# EAGLE board ADS1293testcircuit (EAGLE 8.6.0)
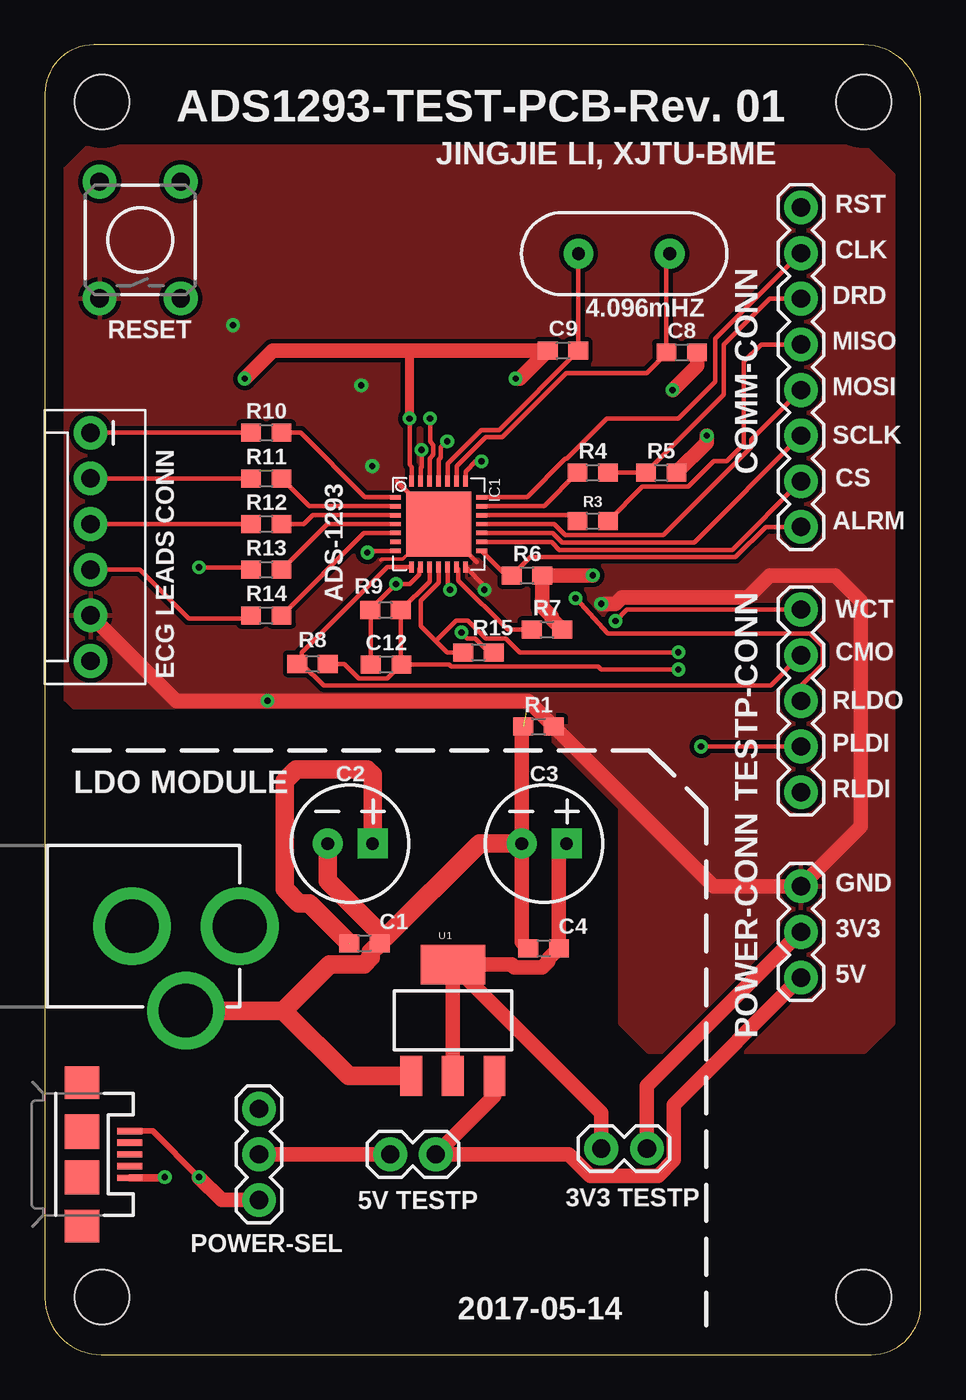
[diagram p0: board, top side]
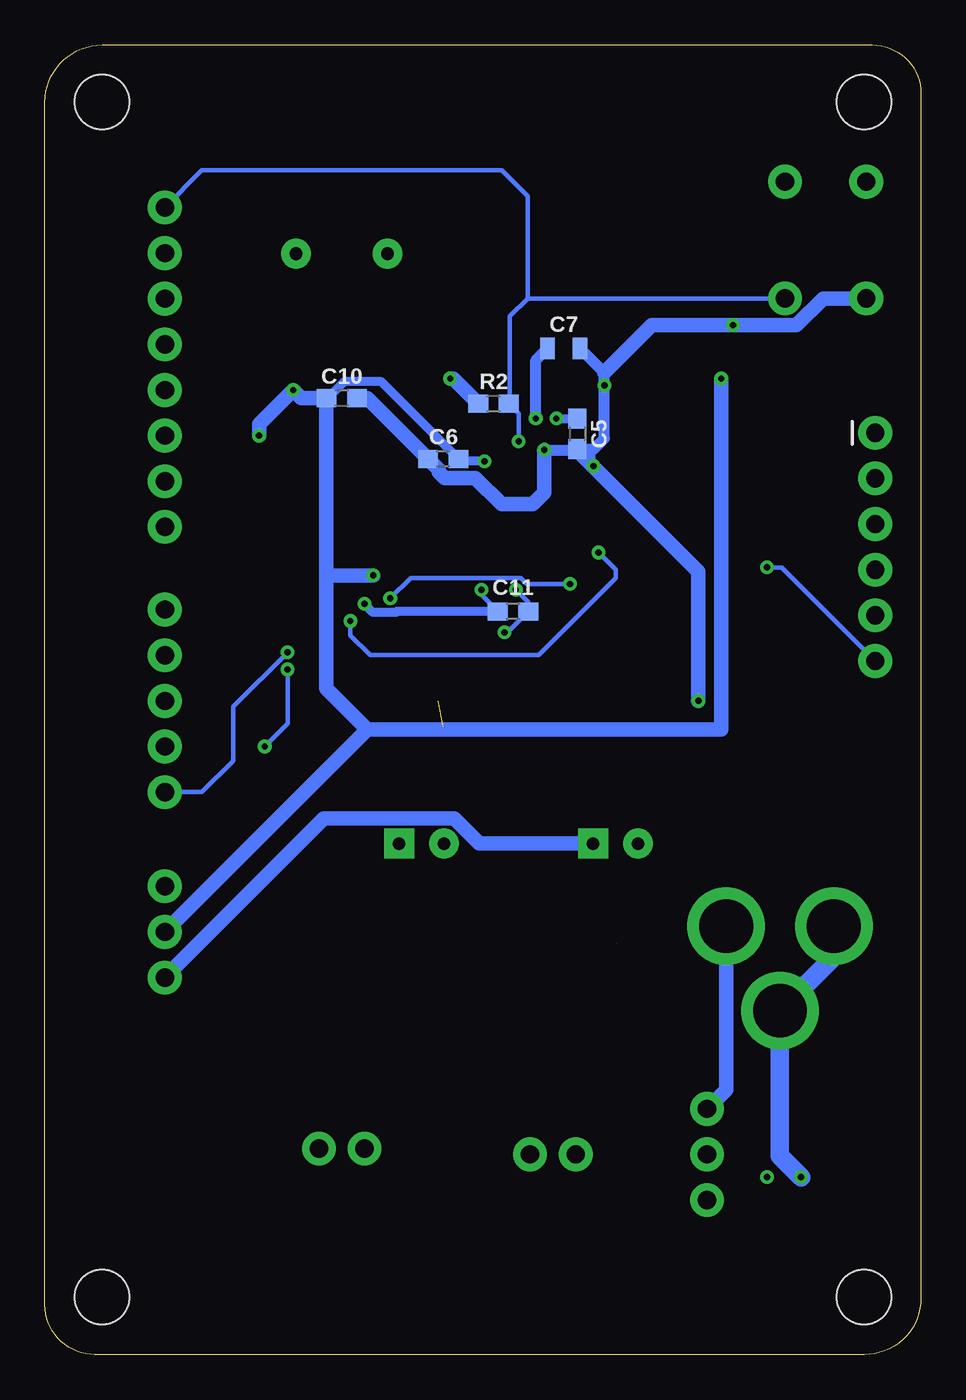
[diagram p1: board, bottom side, seen from below]

Size 48.74 x 72.9 mm. Coordinates in mm from the lower left corner, seen from the top.
Outline: 3.14,0 45.97,0 arc90 48.74,2.77 48.74,69.71 arc90 45.55,72.9 2.71,72.9 arc90 0,70.19 0,3.15 arc90 3.14,0
Copper layers (1*16): Top 0.035mm / dielectric 1.5mm / Bottom 0.035mm
Design rules "default": minimum track width 6mil, minimum drill 0.35mm, track to track 6mil, track to pad 6mil, pad to pad 6mil, via to via 6mil, smd to smd 6mil, copper to edge 40mil, drill to drill 6mil, minimum pad ring 10mil, minimum via ring 8mil, stop-mask expansion 4mil, vias tented up to drill 0mil, thermal gap 10mil

## Footprints (pad centres in the part's own frame; a part is rotated, then mirrored left to right if it is on the bottom)
1X02 = drill 1.016 pad 1.88: 1 0,0; 2 2.54,0
0603 = smd 1.1 x 1: 1 -0.85,0; 2 0.85,0
CPOL-RADIAL-2.5MM-6.5MM = drill 0.7 pad 1.651 square: 1 1.25,0 | drill 0.7 pad 1.651: 2 -1.25,0
0805 = smd 0.8 x 1.2: 1 -0.9,0; 2 0.9,0
1X08 = drill 1.016 pad 1.88: 1 0,0; 2 2.54,0; 3 5.08,0; 4 7.62,0; 5 10.16,0; 6 12.7,0; 7 15.24,0; 8 17.78,0
QFN28-5X5 = smd 0.25 x 0.6: 1 -1.5,-2.4; 2 -1,-2.4; 3 -0.5,-2.4; 4 0,-2.4; 5 0.5,-2.4; 6 1,-2.4; 7 1.5,-2.4; 15 1.5,2.4; 16 1,2.4; 17 0.5,2.4; 18 0,2.4; 19 -0.5,2.4; 20 -1,2.4; 21 -1.5,2.4 | smd 0.6 x 0.25: 8 2.4,-1.5; 9 2.4,-1; 10 2.4,-0.5; 11 2.4,0; 12 2.4,0.5; 13 2.4,1; 14 2.4,1.5; 22 -2.4,1.5; 23 -2.4,1; 24 -2.4,0.5; 25 -2.4,0; 26 -2.4,-0.5; 27 -2.4,-1; 28 -2.4,-1.5 | smd 3.6 x 3.6: GND 0,0
POWER_JACK_PTH = drill 2.997 pad 4.318: GND 0,7.7; GNDBREAK 4.7,10.7; PWR 0,13.7
USB-MICROB = smd 1.4 x 0.35: D+ -2.65,0; D- -2.65,-0.65; GND -2.65,1.3; ID -2.65,0.65; VBUS -2.65,-1.3 | smd 1.9 x 1.8: MT1 0,-4; MT2 0,4 | smd 1.9 x 1.9: P$1 0,-1.27; P$2 0,1.27
1X03 = drill 1.016 pad 1.88: 1 0,0; 2 2.54,0; 3 5.08,0
TACTILE_SWITCH_PTH_6.0MM = drill 1.016 pad 1.88: 1 -3.251,2.261; 2 3.251,2.261; 3 -3.251,-2.261; 4 3.251,-2.261
MOLEX-1X6 = drill 1.016 pad 1.88: 1 0,0; 2 2.54,0; 3 5.08,0; 4 7.62,0; 5 10.16,0; 6 12.7,0
1X05 = drill 1.016 pad 1.88: 1 0,0; 2 2.54,0; 3 5.08,0; 4 7.62,0; 5 10.16,0
SOT223 = smd 1.219 x 2.235: 1 -2.311,-3.099; 2 0,-3.099; 3 2.311,-3.099 | smd 3.6 x 2.2: 4 0,3.099
STAND-OFF-TIGHT = hole 3.048: 0,0
HC49US = drill 0.7 pad 1.651: 1 -2.54,0; 2 2.54,0

## Placement (x,y rotation side)
3V3-POWER-TESTPOINT  [1X02]  33.5,11.46 180 top
5V-POWER-TESTPOINT  [1X02]  21.75,11.14 180 top
C1  0.1uF  [0603]  17.78,22.89 0 top
C2  100uF  [CPOL-RADIAL-2.5MM-6.5MM]  16.99,28.45 0 top
C3  100uF  [CPOL-RADIAL-2.5MM-6.5MM]  27.78,28.45 0 top
C4  0.1uF  [0603]  27.75,22.61 180 top
C5  0.1uF  [0603]  19.11,51.24 270 bottom
C6  0.1uF  [0603]  26.57,49.85 180 bottom
C7  1.0uF  [0805]  19.88,56.01 0 bottom
C8  22pF  [0603]  35.43,55.78 0 top
C9  22pF  [0603]  28.83,55.88 180 top
C10  0.1uF  [0603]  32.23,53.24 0 bottom
C11  0.1uF  [0603]  22.7,41.37 180 bottom
C12  1nF  [0603]  18.99,38.42 0 top
COMM-CONN  [1X08]  42.07,63.85 270 top
IC1  ADS1293  [QFN28-5X5]  21.91,46.23 270 top
J1  POWER_JACK  [POWER_JACK_PTH]  -2.86,23.84 270 top
J2  [USB-MICROB]  2.06,11.14 180 top
POWER-CONN  455-1750-1-ND  [1X03]  42.07,26.07 270 top
POWER-JUMPER  [1X03]  11.91,13.68 270 top
R1  0  [0603]  27.46,34.96 0 top
R2  1M  [0603]  23.78,52.93 180 bottom
R3  51  [0603]  30.48,46.39 0 top
R4  51  [0603]  30.48,49.09 0 top
R5  1M  [0603]  34.29,49.09 0 top
R6  1M  [0603]  26.83,43.37 0 top
R7  1M  [0603]  27.94,40.35 0 top
R8  10k  [0603]  14.89,38.45 180 top
R9  10M  [0603]  18.95,41.43 180 top
R10  0  [0603]  12.32,51.31 0 top
R11  0  [0603]  12.32,48.77 0 top
R12  0  [0603]  12.32,46.23 0 top
R13  0  [0603]  12.32,43.69 0 top
R14  0  [0603]  12.32,41.15 0 top
R15  0  [0603]  24.13,39.08 0 top
S1  MOMENTARY-SWITCH-SPST-PTH-6.0MM  [TACTILE_SWITCH_PTH_6.0MM]  5.3,62.04 90 top
SIGNAL-CONN  [MOLEX-1X6]  2.54,51.31 270 top
TEST-CONN  [1X05]  42.07,41.47 270 top
U1  [SOT223]  22.7,18.61 0 top
U$1  [STAND-OFF-TIGHT]  3.17,69.72 0 top
U$2  [STAND-OFF-TIGHT]  45.56,69.72 0 top
U$3  [STAND-OFF-TIGHT]  3.17,3.21 0 top
U$4  [STAND-OFF-TIGHT]  45.56,3.21 0 top
Y1  4.096MHz  [HC49US]  32.23,61.28 0 top

## Library data of the parts
3V3-POWER-TESTPOINT 5V-POWER-TESTPOINT SIGNAL-CONN TEST-CONN = SparkFun-Connectors
C1 C4-C6 C10 C11 = SparkFun-Capacitors; PROD_ID: CAP-00810
C2 C3 = SparkFun-Capacitors; PROD_ID: CAP-08439
C7 = SparkFun-Capacitors; PROD_ID: CAP-08064
C8 C9 = SparkFun-Capacitors; PROD_ID: CAP-07876
C12 = SparkFun-Capacitors; PROD_ID: CAP-07886
COMM-CONN = SparkFun-Connectors; PROD_ID: CONN-08438
IC1 = texas-ads1293
J1 = SparkFun-Connectors; PROD_ID: CONN-08197
J2 = SparkFun-Connectors; PROD_ID: CONN-09505; SF_ID: PRT-08533
POWER-CONN POWER-JUMPER = SparkFun-Connectors; PROD_ID: XXX-00000
R1 R10-R15 = SparkFun-Resistors; PROD_ID: RES-08609
R2 R5-R7 = SparkFun-Resistors; PROD_ID: RES-07868
R3 R4 = SparkFun-Resistors; PROD_ID: RES-08698
R8 = SparkFun-Resistors; PROD_ID: RES-00824
R9 = SparkFun-Resistors; PROD_ID: RES-08283
S1 = SparkFun-Switches; PROD_ID: SWCH-08441; SF_SKU: COM-00097
U1 = SparkFun-IC-Power; PROD_ID: VREG-08170
U$1-U$4 = SparkFun-Hardware
Y1 = SparkFun-Clocks

## Nets
+3V3: 3V3-POWER-TESTPOINT.1 C5.1 C6.1 C8.2 C9.2 C10.1 IC1.22 IC1.28 POWER-CONN.2 R2.2 R5.2 R6.2 R7.2
+5V: 5V-POWER-TESTPOINT.1 C1.1 C2.1 POWER-CONN.3 U1.3
ALARMB: COMM-CONN.8 IC1.15 R6.1
C: COMM-CONN.6 IC1.17
CLK: COMM-CONN.2 IC1.21
CMOUT: IC1.8 R8.2 TEST-CONN.2
DRDYB: COMM-CONN.3 R4.2 R5.1
GND: C1.2 C2.2 C3.2 C4.2 C5.2 C6.2 C7.2 C10.2 C11.2 IC1.14 IC1.27 J1.GND J1.GNDBREAK J2.GND POWER-CONN.1 R1.1 R1.2 S1.1 SIGNAL-CONN.5 U1.1
LA: R11.1 SIGNAL-CONN.2
LL: R12.1 SIGNAL-CONN.3
MISO: COMM-CONN.4 R3.2
MOSI: COMM-CONN.5 IC1.18
N$1: C7.1 IC1.26
N$2: J2.VBUS POWER-JUMPER.3
N$3: J1.PWR POWER-JUMPER.1
N$5: C8.1 IC1.23 Y1.2
N$6: C9.1 IC1.24 Y1.1
N$7: IC1.19 R3.1
N$8: IC1.20 R4.1
N$9: IC1.13 R7.1
N$10: C11.1 IC1.12 R15.2
N$11: IC1.1 R10.2
N$12: IC1.2 R11.2
N$13: IC1.3 R12.2
N$14: IC1.4 R13.2
N$15: IC1.5 R14.2
N$16: 5V-POWER-TESTPOINT.2 POWER-JUMPER.2
N$17: 3V3-POWER-TESTPOINT.2 C3.1 C4.1 U1.2 U1.4
RA: R10.1 SIGNAL-CONN.1
RL: R13.1 SIGNAL-CONN.6
RLDIN: IC1.11 R15.1 TEST-CONN.5
RLDINIV: C12.2 IC1.10 R8.1 R9.1 TEST-CONN.4
RLDOUT: C12.1 IC1.9 R9.2 TEST-CONN.3
RSTBCON: COMM-CONN.1 IC1.25 R2.1 S1.3
SS: COMM-CONN.7 IC1.16
V1: R14.1 SIGNAL-CONN.4
WCT: IC1.7 TEST-CONN.1

## Tracks (layer width: path | path; a pad name or v marks a point on that pad's centre or on a via)
+3V3  (via drill 0.35, 0.35 pad 0.55)
  Top 0.254: IC1.28 20.41,49.41 20.29,49.53 v20.29,52.1 | IC1.22 23.41,49.16 23.97,49.72 v24.29,49.72
  Top 0.508: v20.29,52.1 20.29,55.85 20.32,55.88
  Top 0.813: 3V3-POWER-TESTPOINT.1 33.5,14.95 POWER-CONN.2 | v34.92,53.69 36.28,55.05 C8.2 | v36.83,51.15 36.83,50.78 R5.2 | v11.11,54.32 12.67,55.88 20.32,55.88 C9.2 26.42,54.32 v26.19,54.32 | R7.2 28.2,40.95 28.2,41.09 27.68,41.61 R6.2 v30.48,43.37
  Bottom 0.508: v20.29,52.1 v20.28,52.09 C5.1 | v24.29,49.72 25.6,49.72 C6.1 30.03,54.15 32.09,54.15 33,53.24 C10.1
  Bottom 0.813: 24.57,52.99 R2.2 26.03,54.32 v26.19,54.32 | POWER-CONN.2 30.8,34.8 | 30.8,34.8 11.11,34.8 v11.11,54.32 | 30.8,34.8 33.08,37.08 33.08,43.37 | 33.08,43.37 C10.1 34.48,53.24 v34.92,53.69 36.83,51.78 v36.83,51.15 | v30.48,43.37 33.08,43.37
+5V  (1 unrouted)
  Top 0.813: U1.3 25.01,14.41 5V-POWER-TESTPOINT.1 29.15,11.14 30.34,9.96 34.12,9.96 34.99,10.84 34.99,13.91 POWER-CONN.3
  Top 1.016: C2.1 18.24,32.28 17.94,32.58 13.97,32.58 13.34,31.94 13.34,25.91 14.13,25.11 14.71,25.11 16.92,22.9 16.93,22.9
  Bottom 0.813: C2.1 24.57,28.45 25.96,29.83 33.22,29.83 POWER-CONN.3
ALARMB
  Top 0.254: IC1.15 25.66,43.37 R6.1 27,44.39 38.42,44.39 40.1,46.07 COMM-CONN.8
C
  Top 0.254: IC1.17 28.27,45.73 28.8,45.2 36.12,45.2 COMM-CONN.6
CLK
  Top 0.254: IC1.21 26.83,47.73 28.96,49.87 29.04,49.87 31.27,52.1 35.24,52.1 37.31,54.17 37.31,56.55 COMM-CONN.2
CMOUT
  Top 0.254: TEST-CONN.2 40.38,37.23 15.51,37.23 14.3,38.45 R8.2 14.3,38.7 14.3,39.07 19.05,43.83 IC1.8
DRDYB
  Top 0.254: R4.2 R5.1 37.78,53.43 37.78,56.23 40.32,58.77 COMM-CONN.3
GND  (via drill 0.35, 0.35 pad 0.55)  (1 unrouted)
  Top 0.203: 18.69,44.22 18.75,44.27 19.91,44.27 20.37,44.73 20.37,47.8
  Top 0.254: IC1.27 20.91,49.35 20.95,49.4 v20.95,50.35 | IC1.14 24.45,42.79 v24.45,42.58 | 19.61,48.62 19.61,48.56 20.37,47.8 | 24.03,44.12 23.52,44.63 23.5,44.63
  Top 0.406: J2.GND 6.64,9.84 v6.67,9.87
  Top 0.813: C4.2 26.53,22.97 C3.2 26.53,34.87 R1.1 | SIGNAL-CONN.5 7.3,36.39 v12.38,36.39 26.89,36.39 R1.2 37.2,26.07 POWER-CONN.1 45.4,29.4 45.4,41.94 43.97,43.37 40.32,43.37 39.1,42.15 32.1,42.15 31.73,41.78 v30.96,41.78
  Top 1.016: J1.GNDBREAK 13.27,19.14 | U1.1 16.91,15.51 13.27,19.14 | 13.27,19.14 15.86,21.73 17.75,21.73 18.14,22.12 18.14,22.4 C1.2 18.92,23.18 | 18.92,23.18 24.19,28.45 C3.2 | 18.92,23.18 15.74,26.36 C2.2
  Bottom 0.203: v18.21,49.45 18.21,50.39 18.22,50.39
  Bottom 0.254: v24.45,42.58 24.45,42.27 C11.2
  Bottom 0.508: 20.95,50.52 v20.95,50.35 | C11.2 29.15,41.37 29.2,41.32 30.49,41.32 v30.96,41.78
  Bottom 0.61: v20.95,50.35 19.15,50.35 C5.2 18.22,50.39 17.62,50.99 17.62,54.65 C7.2
  Bottom 0.813: v12.38,36.39 12.38,43.59 19.15,50.35 | C7.2 | C10.2 30.82,53.24 C6.2 26.83,49.26 26.83,49.12 26.51,48.79 24.79,48.79 23.34,47.34 21.59,47.34 20.95,47.97 v20.95,50.35 | S1.1 5.44,58.79 6.94,57.29 14.98,57.29 17.62,54.65
  Bottom 1.016: v6.67,9.87 7.84,11.05 J1.GNDBREAK 4.84,22.14 J1.GND
  other vias: 10.46,57.3 17.6,53.95
  pour Top (isolate 0.254): 0.8,52.04 0.8,64.04 0.8,65.64 1.6,66.44 2.4,67.24 45.6,67.24 47.2,65.64 47.2,18.44 45.6,16.84 33.6,16.84 32,18.44 32,30.44 28.8,33.64 28,34.44 28,36.04 1.6,36.04 0.8,36.84
LA
  Top 0.254: SIGNAL-CONN.2 R11.1
LL
  Top 0.254: SIGNAL-CONN.3 R12.1
MISO
  Top 0.254: R3.2 33.25,48.31 35.81,48.31 37.22,49.72 37.94,49.72 38.89,50.67 38.89,55.28 39.85,56.23 COMM-CONN.4
MOSI
  Top 0.254: COMM-CONN.5 39.3,50.92 39.3,50.51 34.4,45.61 28.96,45.61 28.34,46.23 IC1.18
N$1  (via drill 0.35 pad 0.55)
  Top 0.254: IC1.26 21.41,49.88 21.61,50.08 21.61,50.63 21.43,50.81 v21.43,52.1
  Bottom 0.61: C7.1 21.43,55.35 v21.43,52.1
N$2  (via drill 0.35 pad 0.55)
  Top 0.305: J2.VBUS 6,12.44 v8.57,9.87
  Top 0.813: v8.57,9.87 9.84,8.6 POWER-JUMPER.3
N$3
  Bottom 0.813: POWER-JUMPER.1 10.84,14.75 J1.PWR
N$5
  Top 0.254: 34.77,55.97 C8.1 | IC1.23 22.91,49.45 24.52,51.06 25.43,51.06 29.02,54.64 33.5,54.64 34.58,55.73 C8.1 | C8.1 34.58,61.09 Y1.2
N$6
  Top 0.254: IC1.24 22.41,49.59 24.29,51.47 25.27,51.47 C9.1 29.68,61.27 Y1.1
N$7
  Top 0.254: IC1.19 29.29,46.73 R3.1
N$8
  Top 0.254: IC1.20 27.77,47.23 R4.1
N$9
  Top 0.254: IC1.13 23,43.73 23,43.09 25.74,40.35 R7.1
N$10  (via drill 0.35 pad 0.55)
  Top 0.254: IC1.12 22.41,42.71 v22.54,42.58 | v23.18,40.2 23.51,39.86 23.95,39.86 24.73,39.08 R15.2
  Bottom 0.254: v22.54,42.58 21.85,41.89 C11.1 23.03,40.2 v23.18,40.2
N$11
  Top 0.254: R10.2 14.22,51.31 17.8,47.73 IC1.1
N$12
  Top 0.254: R11.2 14.71,47.23 IC1.2
N$13
  Top 0.254: R12.2 14.41,46.23 14.91,46.73 IC1.3
N$14
  Top 0.254: R13.2 15.71,46.23 IC1.4
N$15
  Top 0.254: R14.2 17.75,45.73 IC1.5
N$16
  Top 0.813: POWER-JUMPER.2 5V-POWER-TESTPOINT.2
N$17
  Top 0.813: 3V3-POWER-TESTPOINT.2 30.96,13.45 U1.4 | U1.4 U1.2 | U1.4 25.96,21.7 26.12,21.55 27.68,21.55 28.01,21.88 28.01,22.02 C4.1 28.6,28.02 C3.1
RA
  Top 0.254: SIGNAL-CONN.1 R10.1
RL  (via drill 0.35)
  Top 0.254: v8.57,43.81 11.34,43.81 R13.1
  Bottom 0.254: SIGNAL-CONN.6 7.75,43.81 v8.57,43.81
RLDIN  (via drill 0.35 pad 0.55)
  Top 0.254: IC1.11 21.91,42.96 20.92,41.98 20.92,40.55 21.75,39.72 | 21.75,39.72 22.38,39.08 R15.1 23.54,39.08 | v35.24,39.08 26.43,39.08 25.65,39.86 24.52,39.86 23.53,40.85 22.88,40.85 21.75,39.72
  Bottom 0.254: v35.24,39.08 38.26,36.07 38.26,33.05 40.01,31.31 TEST-CONN.5
RLDINIV  (via drill 0.35 pad 0.55)
  Top 0.254: IC1.10 21.41,43.04 R9.1 19.8,38.39 | R8.1 16.66,38.45 17.47,37.64 19.06,37.64 19.8,38.39 | 19.8,38.39 C12.2 22.5,38.42 22.61,38.3 30.78,38.3 30.96,38.13 v35.24,38.13 | v36.51,33.85 TEST-CONN.4
  Bottom 0.254: v35.24,38.13 35.24,35.12 v36.51,33.85
RLDOUT  (via drill 0.35 pad 0.55)
  Top 0.254: C12.1 18.14,41.4 | 18.14,41.4 R9.2 | IC1.9 20.81,43.73 20.81,43.41 20.29,42.89 v19.53,42.89 18.14,41.51 18.14,41.4 | TEST-CONN.3 42.07,37.2 43.29,38.42 43.29,39.43 42.57,40.14 31.32,40.14 v29.53,42.1
  Bottom 0.254: v19.53,42.89 21.93,42.89 22.27,43.23 28.39,43.23 v29.53,42.1
RSTBCON  (via drill 0.35 pad 0.55)
  Top 0.254: IC1.25 21.91,49.8 22.02,49.91 22.02,50.51 22.34,50.83 v22.38,50.83
  Bottom 0.254: R2.1 22.88,52.88 | 22.88,52.88 22.38,52.38 v22.38,50.83 | S1.3 21.89,58.79 | 22.88,52.88 22.88,57.8 21.89,58.79 | 21.89,58.79 21.89,64.47 23.34,65.91 40.01,65.91 COMM-CONN.1
SS
  Top 0.254: IC1.16 28.19,45.23 28.63,44.8 38.25,44.8 COMM-CONN.7
V1
  Top 0.254: SIGNAL-CONN.4 5.27,43.69 8,40.96 11.28,40.96 R14.1
WCT  (via drill 0.35 pad 0.55)
  Top 0.254: IC1.7 18.03,44.73 v17.94,44.64 | v31.75,40.83 32.38,41.46 TEST-CONN.1
  Bottom 0.254: v17.94,44.64 16.99,43.69 16.99,43.21 21.27,38.93 30.64,38.93 31.75,40.04 v31.75,40.83

## Text on the board
tPlace: ADS1293-TEST-PCB-Rev. 01 | JINGJIE LI, XJTU-BME | RST | CLK | 4.096mHZ | DRD | RESET | MISO | MOSI | SCLK | CS | ALRM | WCT | CMO | RLDO | PLDI | RLDI | GND | 3V3 | 5V | 5V TESTP | 3V3 TESTP | POWER-SEL | 2017-05-14
tNames: COMM-CONN | ADS-1293 | ECG LEADS CONN | LDO MODULE | TESTP-CONN | POWER-CONN